# EAGLE board ESP8266-07_Adapter (EAGLE 9.5.1)
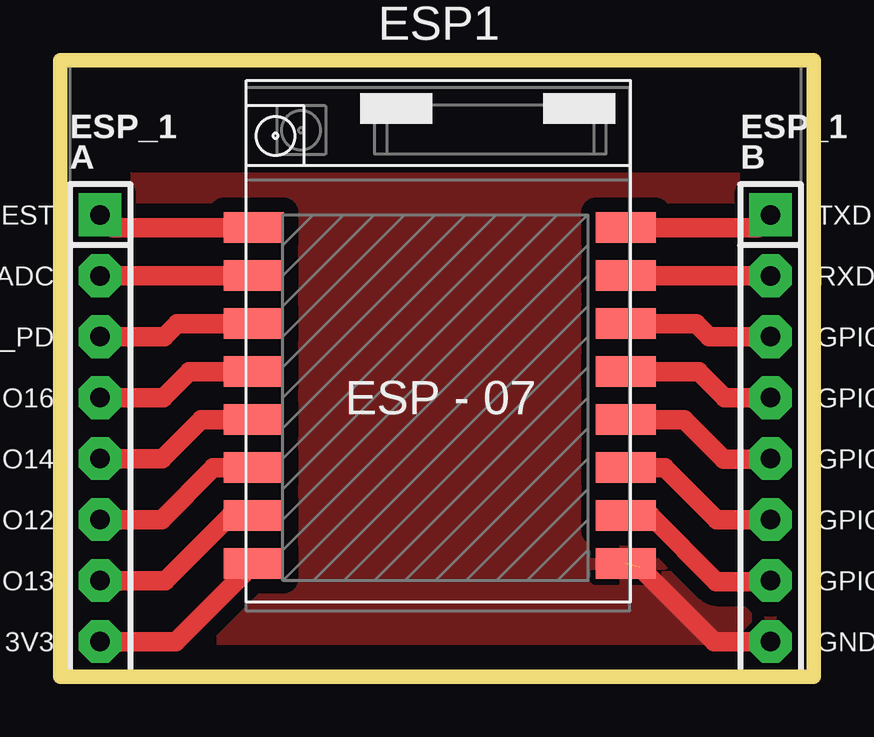
[diagram p0: board, top side]

Size 31.4 x 25.7 mm. Coordinates in mm from the lower left corner, seen from the top.
Outline: 0,25.5 0,25.3 0,0 31.4,0 31.4,25.7 0,25.7 0,25.5
Copper layers (1*16): Top 0.035mm / dielectric 1.5mm / Bottom 0.035mm
Design rules "default": minimum track width 6mil, minimum drill 0.35mm, track to track 6mil, track to pad 6mil, pad to pad 6mil, via to via 6mil, smd to smd 6mil, copper to edge 40mil, drill to drill 6mil, minimum pad ring 10mil, minimum via ring 8mil, stop-mask expansion 4mil, vias tented up to drill 0mil, thermal gap 10mil

## Footprints (pad centres in the part's own frame; a part is rotated, then mirrored left to right if it is on the bottom)
ESP-07-SMT = smd 2.5 x 1.27: ADC -7.696,5.209; EN -7.696,3.209; GND 7.801,-6.791; GPIO0 7.801,-0.791; GPIO2 7.801,-2.791; GPIO4 7.801,1.209; GPIO5 7.801,3.209; GPIO12 -7.696,-2.791; GPIO13 -7.696,-4.791; GPIO14 -7.696,-0.791; GPIO15 7.801,-4.791; GPIO16 -7.696,1.209; RST -7.696,7.209; RX 7.801,5.209; TX 7.801,7.209; VCC -7.696,-6.791
ESP8266-ADAPTER = drill 0.813 pad 1.778 square: 1 -13.97,8.89; 9 13.97,8.89 | drill 0.813 pad 1.778 octagon: 2 -13.97,6.35; 3 -13.97,3.81; 4 -13.97,1.27; 5 -13.97,-1.27; 6 -13.97,-3.81; 7 -13.97,-6.35; 8 -13.97,-8.89; 10 13.97,6.35; 11 13.97,3.81; 12 13.97,1.27; 13 13.97,-1.27; 14 13.97,-3.81; 15 13.97,-6.35; 16 13.97,-8.89

## Placement (x,y rotation side)
ESP1  ESP8266-07SMT  [ESP-07-SMT]  15.77,11.5 0 top
ESP_1  ESP8266-WITH-ADAPTER  [ESP8266-ADAPTER]  15.64,10.36 0 top

## Library data of the parts
ESP1 = esp8266-07
ESP_1 = esp8266_with_adapter

## Nets
ADC: ESP1.ADC ESP_1.2
CH_PD: ESP1.EN ESP_1.3
GND: ESP1.GND ESP_1.16
GPIO0: ESP1.GPIO0 ESP_1.13
GPIO2: ESP1.GPIO2 ESP_1.14
GPIO4: ESP1.GPIO4 ESP_1.12
GPIO5: ESP1.GPIO5 ESP_1.11
GPIO12: ESP1.GPIO12 ESP_1.6
GPIO13: ESP1.GPIO13 ESP_1.7
GPIO14: ESP1.GPIO14 ESP_1.5
GPIO15: ESP1.GPIO15 ESP_1.15
GPIO16: ESP1.GPIO16 ESP_1.4
RESET: ESP1.RST ESP_1.1
RXD: ESP1.RX ESP_1.10
TXD: ESP1.TX ESP_1.9
VCC: ESP1.VCC ESP_1.8

## Tracks (layer width: path | path; a pad name or v marks a point on that pad's centre or on a via)
ADC
  Top 0.813: ESP_1.2 ESP1.ADC
CH_PD
  Top 0.813: ESP_1.3 4.35,14.17 4.89,14.71 ESP1.EN
GND  (1 unrouted)
  Top 0.813: ESP_1.16 27.25,1.47 24.15,4.57
  pour Top (isolate 0.61): 0.35,20.77 30.75,20.77 30.95,20.57 30.95,0.27 0.45,0.27 0.45,20.67
GPIO0
  Top 0.813: ESP1.GPIO0 26.01,10.71 27.65,9.07 29.59,9.07 ESP_1.13
GPIO2
  Top 0.813: ESP1.GPIO2 25.21,8.71 27.37,6.55 ESP_1.14
GPIO4
  Top 0.813: ESP1.GPIO4 26.61,12.71 27.69,11.63 ESP_1.12
GPIO5
  Top 0.813: ESP1.GPIO5 26.51,14.71 27.05,14.17 ESP_1.11
GPIO12
  Top 0.813: ESP_1.6 4.23,6.55 6.39,8.71 ESP1.GPIO12
GPIO13
  Top 0.813: ESP_1.7 4.39,4.01 7.09,6.71 ESP1.GPIO13
GPIO14
  Top 0.813: ESP_1.5 4.27,9.09 5.89,10.71 ESP1.GPIO14
GPIO15
  Top 0.813: ESP1.GPIO15 24.61,6.71 27.35,3.97 29.57,3.97 ESP_1.15
GPIO16
  Top 0.813: ESP_1.4 4.31,11.63 5.39,12.71 ESP1.GPIO16
RESET
  Top 0.813: ESP_1.1 2.21,18.71 ESP1.RST
RXD
  Top 0.813: ESP1.RX ESP_1.10
TXD
  Top 0.813: ESP1.TX 29.07,18.71 ESP_1.9
VCC
  Top 0.813: ESP_1.8 4.83,1.47 ESP1.VCC